# EAGLE board 737819ECR192designFile (EAGLE 9.7.0)

Size 210.87 x 143.2 mm. Coordinates in mm from the lower left corner, seen from the top.
Outline: 0,0 210.87,0 210.87,143.2 0,143.2 0,0
Copper layers (1*16): Top 0.035mm / dielectric 1.5mm / Bottom 0.035mm
Design rules "default": minimum track width 6mil, minimum drill 0.35mm, track to track 6mil, track to pad 6mil, pad to pad 6mil, via to via 6mil, smd to smd 6mil, copper to edge 40mil, drill to drill 6mil, minimum pad ring 10mil, minimum via ring 8mil, stop-mask expansion 4mil, vias tented up to drill 0mil, thermal gap 10mil

## Footprints (pad centres in the part's own frame; a part is rotated, then mirrored left to right if it is on the bottom)
1X02 = drill 1.016 long: 1 -1.27,0; 2 1.27,0
PIEZO = drill 1 pad 1.6: 1 -3.5,0; 2 3.5,0
28027 = drill 1.016 long: 1 -2.54,0; 2 0,0; 3 2.54,0
TO92 = drill 0.813 octagon: 1 -1.27,0; 2 0,1.905; 3 1.27,0
ARDUINO-UNO-R3-SHIELD = drill 1.016 pad 1.88: 3.3V 24.13,-2.54; 5V 24.13,0; A0 24.13,12.7; A1 24.13,15.24; A2 24.13,17.78; A3 24.13,20.32; A4 24.13,22.86; A5 24.13,25.4; AREF -24.13,-13.97; D2 -24.13,20.32; D3 -24.13,17.78; D4 -24.13,15.24; D5 -24.13,12.7; D6 -24.13,10.16; D7 -24.13,7.62; D8 -24.13,3.81; D9 -24.13,1.27; D10 -24.13,-1.27; D11 -24.13,-3.81; D12 -24.13,-6.35; D13 -24.13,-8.89; GND@0 24.13,2.54; GND@1 24.13,5.08; GND@2 -24.13,-11.43; IOREF 24.13,-7.62; NC 24.13,-10.16; RES 24.13,-5.08; RX -24.13,25.4; SCL -24.13,-19.05; SDA -24.13,-16.51; TX -24.13,22.86; VIN 24.13,7.62

## Placement (x,y rotation side)
L1  LIGHTBULB  [1X02]  71.44,128.45 0 top
PIEZO1  PIEZO  [PIEZO]  199.13,100.11 0 top
PIR1  PIR-SENSOR_28027  [28027]  129.01,136.85 0 top
U1  TMP36GT9Z_TO92  [TO92]  25.53,123.43 0 top
U2  ARDUINO-UNO-R3-SHIELD  [ARDUINO-UNO-R3-SHIELD]  47.88,29.84 270 top

## Library data of the parts
L1 PIEZO1 PIR1 U1 U2 = Tinkercad

## Nets
U2_5V: PIR1.2 U1.3 U2.5V
U2_A1: U1.2 U2.A1
U2_D2: PIEZO1.1 U2.D2
U2_D7: L1.1 U2.D7
U2_D12: PIR1.1 U2.D12
U2_GND: L1.2 PIEZO1.2 PIR1.3 U1.1 U2.GND@0 U2.GND@1 U2.GND@2

## Tracks (layer width: path | path; a pad name or v marks a point on that pad's centre or on a via)
U2_5V  (2 unrouted)
U2_A1  (1 unrouted)
U2_D2  (1 unrouted)
U2_D7  (1 unrouted)
U2_D12  (1 unrouted)
U2_GND  (6 unrouted)